# EAGLE board Cislo_I2C (EAGLE 8.0.2)
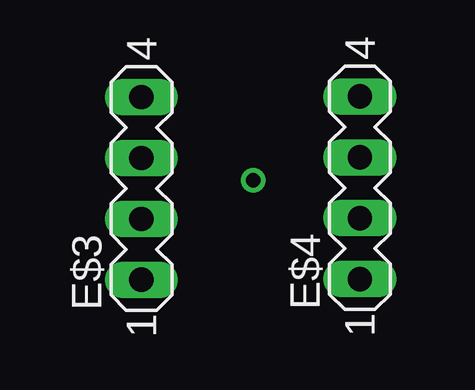
[diagram p0: board, top side]
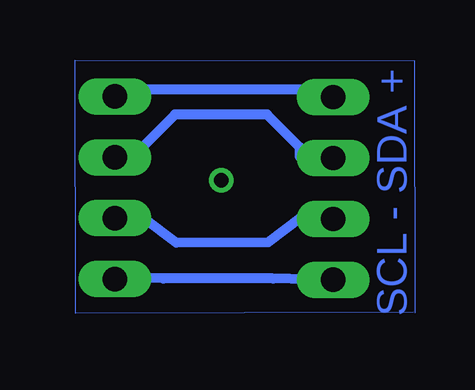
[diagram p1: board, bottom side, seen from below]

No outline drawn. Coordinates in mm, seen from the top.
Copper layers (1*16): Top 0.035mm / dielectric 1.5mm / Bottom 0.035mm
Design rules "default": minimum track width 10mil, minimum drill 24mil, track to track 8mil, track to pad 8mil, pad to pad 8mil, via to via 8mil, smd to smd 8mil, copper to edge 40mil, drill to drill 8mil, minimum pad ring 10mil, minimum via ring 8mil, stop-mask expansion 4mil, vias tented up to drill 0mil, thermal gap 10mil

## Footprints (pad centres in the part's own frame; a part is rotated, then mirrored left to right if it is on the bottom)
MA04-1 = drill 1.016 long: 1 -3.81,0; 2 -1.27,0; 3 1.27,0; 4 3.81,0

## Placement (x,y rotation side)
E$3  [MA04-1]  3.4,5.16 90 top
E$4  [MA04-1]  12.51,5.19 90 top

## Library data of the parts
E$3 E$4 = con-lstb

## Tracks (layer width: path | path; a pad name or v marks a point on that pad's centre or on a via)
S$1  (via drill 0.6 pad 1.02)
  other vias: 8.07,5.51
S$2
  Bottom 0.406: 4.59,9.28 11.21,9.29 11.47,9.12
S$3
  Bottom 0.406: 4.34,3.98 4.74,3.95 6.11,2.91 9.94,2.89 11.29,3.9
S$4
  Bottom 0.406: 4.49,1.28 4.45,1.37 5.91,1.4 10.48,1.4 11.34,1.44
S$5
  Bottom 0: 0.06,0 14.15,-0.04 14.17,10.51 0.02,10.49 0,-0.03
S$6
  Bottom 0.406: 4.78,6.46 4.78,6.87 6.16,8.25 10,8.25 11.44,6.81

## Text on the board
Bottom: SCL - SDA +